# Altium PCB PCB.PcbDoc
Units mil, origin at the board's own origin, x right, y up, seen from the top; angles counter-clockwise.
Board outline 3543.31 x 2047.24 mil, 2 copper layers (Top Layer, Bottom Layer); 28 components, 33 nets, 105 pads, 0 vias.
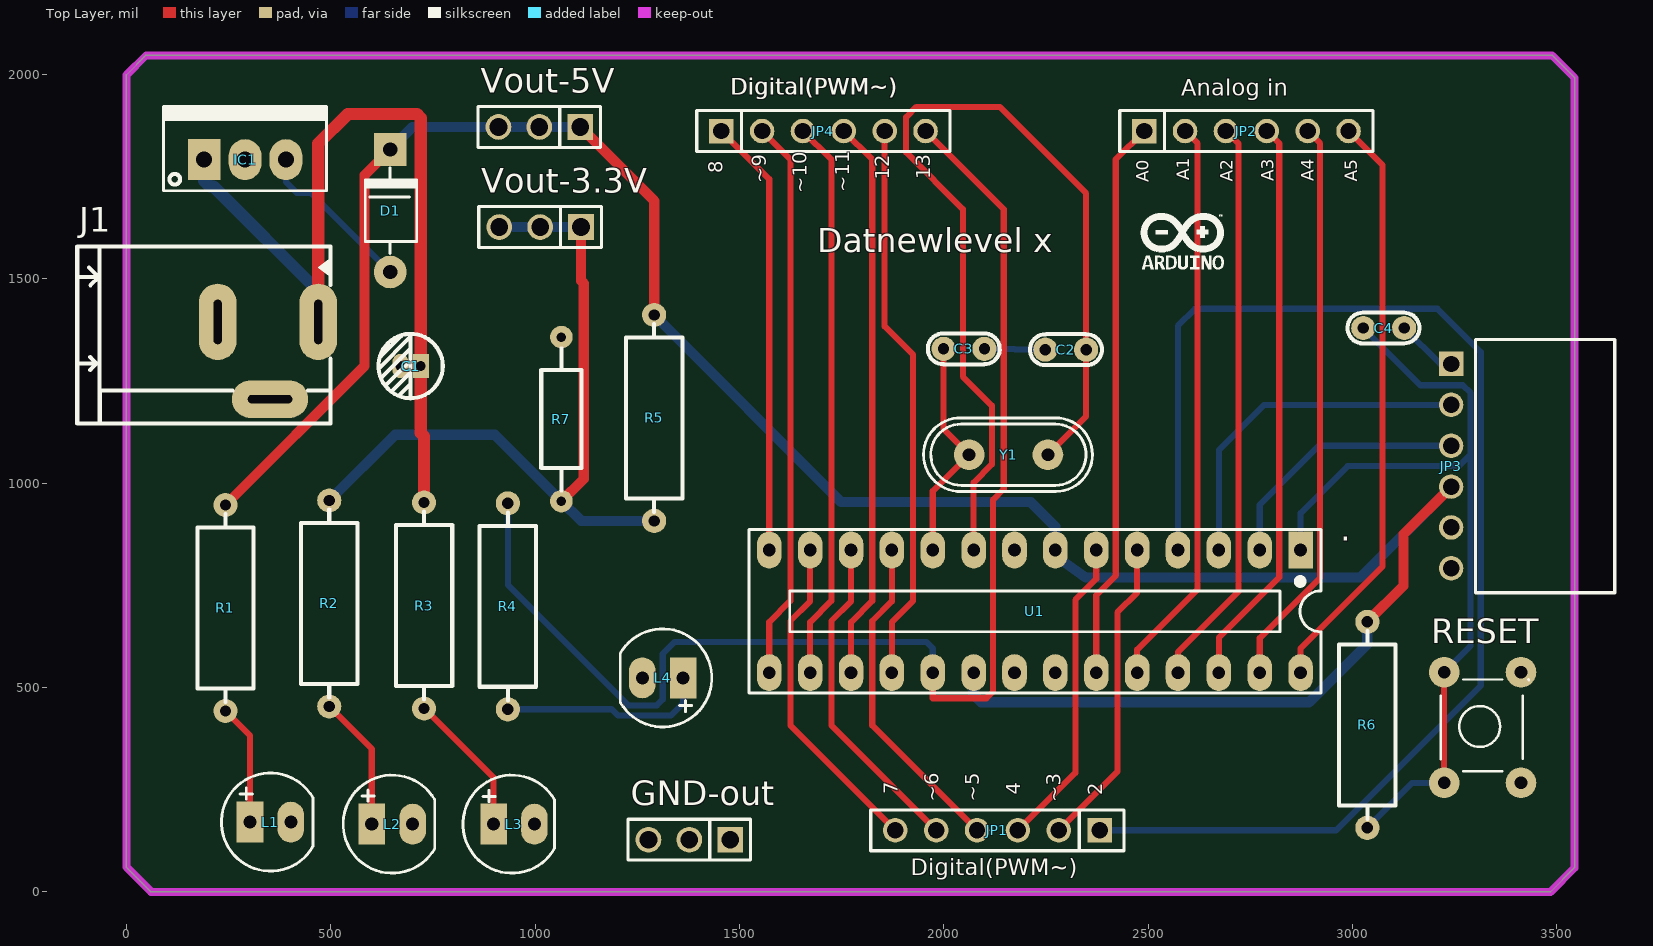
[diagram p0: Top Layer view]
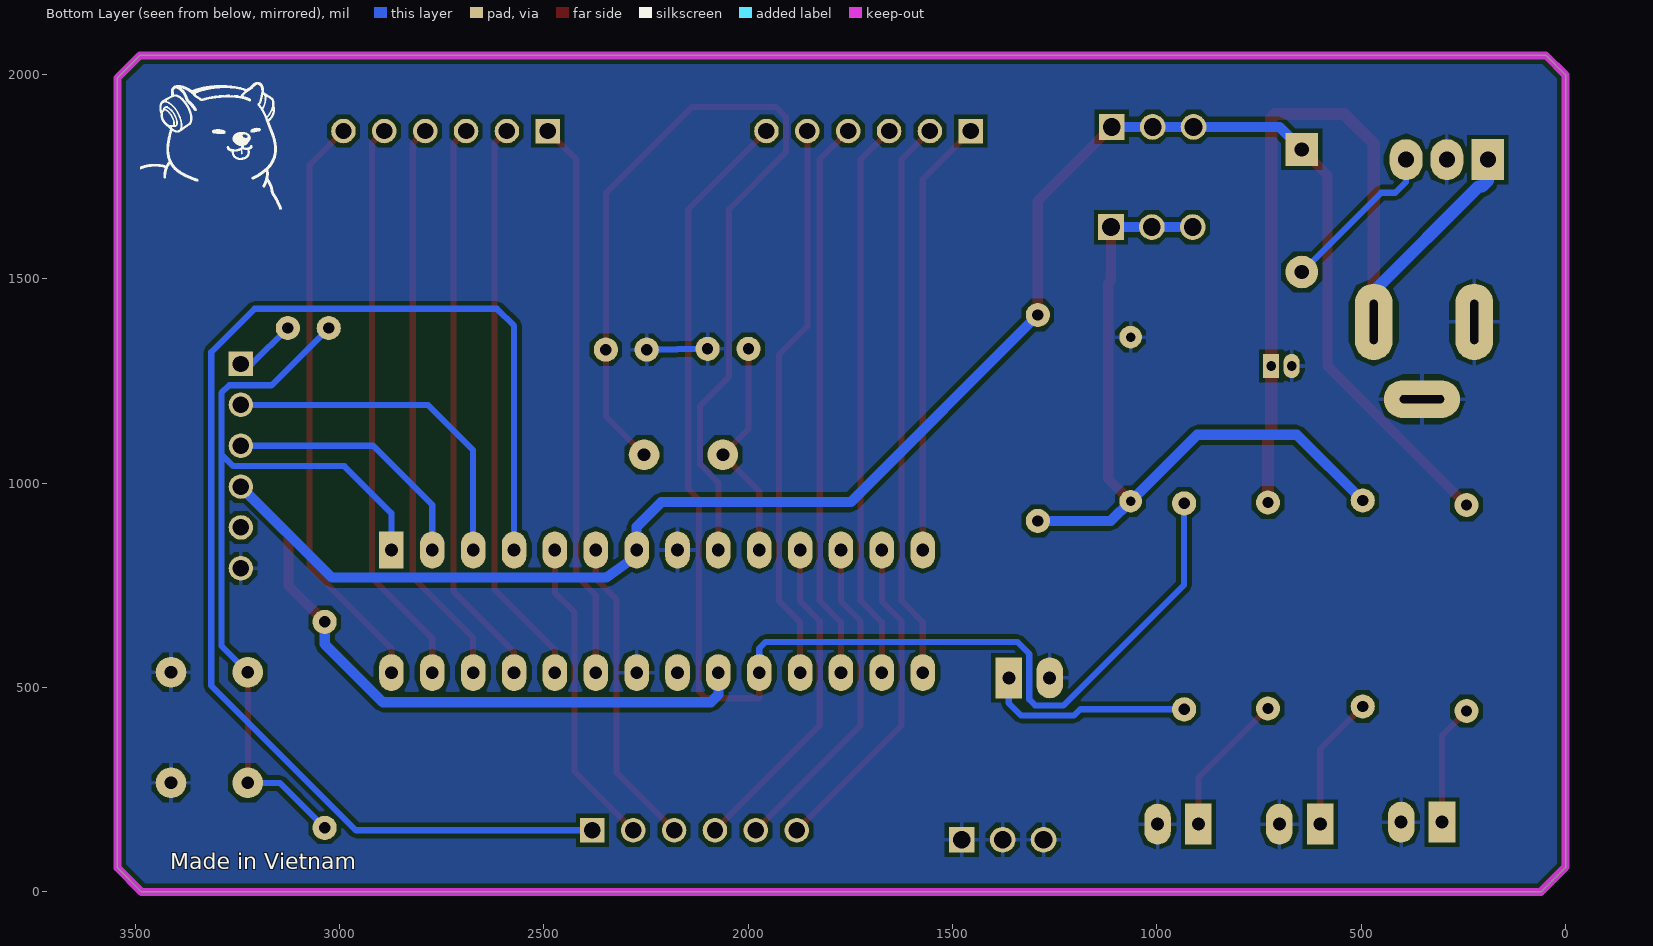
[diagram p1: Bottom Layer view, seen from below]
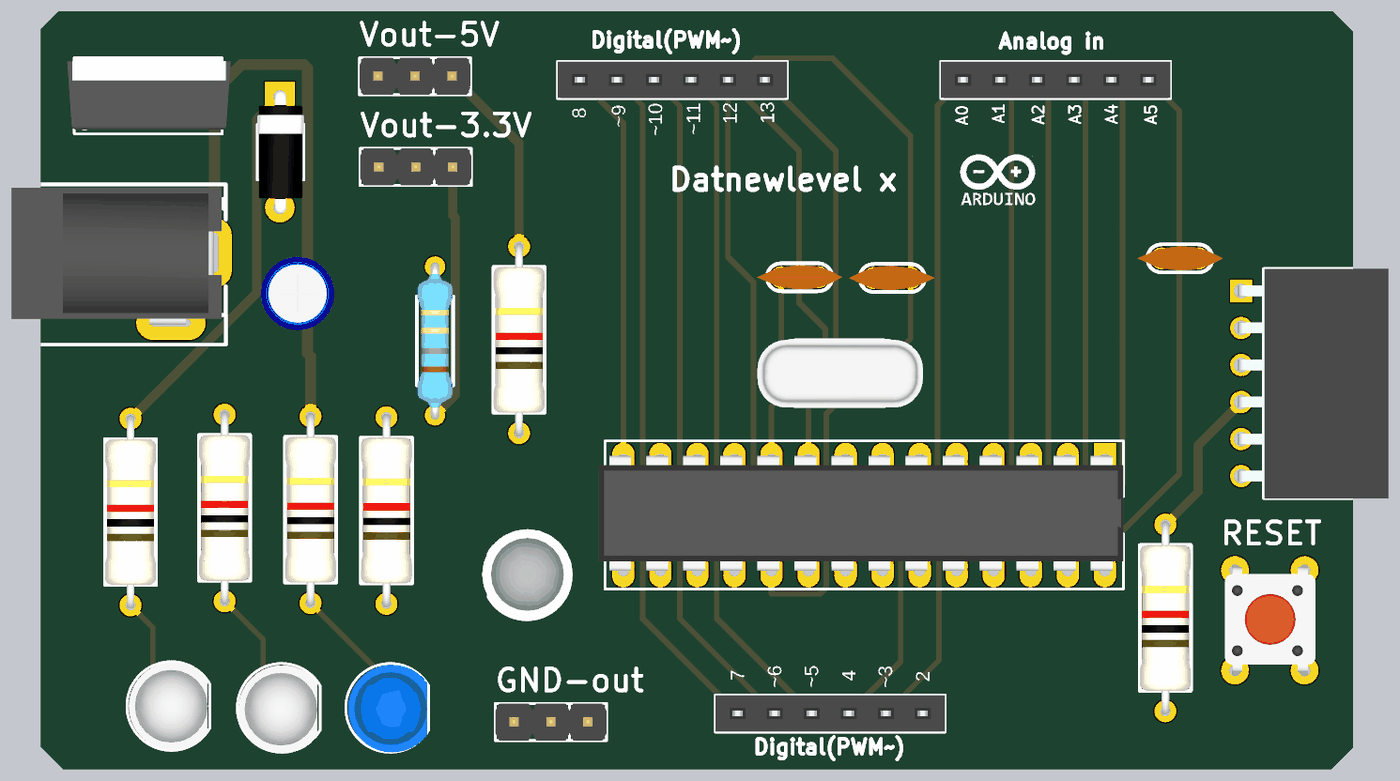
[diagram p2: 3D render of the assembled board from above, using the file's embedded part models]

## Layer stack, top to bottom
Top Solder: solder mask 0.4, Solder Resist, Dk 3.5
Top Layer: signal copper 1.4
Dielectric 1: dielectric 12.6, FR-4, Dk 4.8
Bottom Layer: signal copper 1.4
Bottom Solder: solder mask 0.4, Solder Resist, Dk 3.5

## Board outline
0,60.04 60.04,0 3484.25,0 3543.31,59.05 3543.31,1992.13 3488.19,2047.24 48.23,2047.24 0,1999.02

## Design rules (kind name [scope] priority, off if disabled: settings)
Clearance [All] p1: gap=10 ignorepadtopadclearanceinfootprint=FALSE
PolygonConnect [All] p1: connectstyle=Relief reliefconductorwidth=10 reliefentries=4 polygonreliefangle="90 Angle" airgapwidth=10
RoutingVias [All] p1: holewidth=25 width=25 viastyle="Through Hole" minholewidth=25 minwidth=25 maxholewidth=25 maxwidth=25
SolderMaskExpansion [All] p1: expansion=4 istentingtop=FALSE
Width "Schematic Width Constraint_2" [InNet('3.3V')] p1: maxlimit=25 minlimit=25 preferedwidth=25
Width "Schematic Width Constraint_1" [InNet('9V')] p2: maxlimit=30 minlimit=30 preferedwidth=30
Width "Schematic Width Constraint" [InNet('5V')] p3: maxlimit=25 minlimit=25 preferedwidth=25
Width [All] p4: maxlimit=15 minlimit=15 preferedwidth=15
30 further rules are at their usual default settings.

## Components (designator, comment, footprint, x,y, rotation, side; value= is the part's Value field where it differs from the comment)
C1 "10uF" "tu hoa 4mm" 695.39,1286.81 r180 top
C2 "22pF" "tu gom" 2298.39,1326.81 r180 top
C3 "22pF" "tu gom" 2049.39,1328.81 r0 top
C4 "101" "tu gom" 3076.39,1379.81 r0 top
D1 "100v" "DIODE 1A" 645.39,1466.81 r270 top
GND-out "JP 1x3 2.54" "JP 1x3 DT" 1477.39,127.81 r180 top
IC1 "LM7805" QTO-220 190.39,1791.81 r0 top
J1 "DC -JACK" CON3_129_PJ-002A_TH_RA 469.43,1394.69 r0 top
JP1 "Digital pin" "JP 1x6 CT" 2381.39,150.81 r180 top
JP2 "Analog pin" "JP 1x6 CT" 2490.39,1861.81 r0 top
JP3 "JP 1x6 2.54" "JP 1x6 CC" 3241.28,1041.81 r270 top
JP4 "Digital Pin" "JP 1x6 CT" 1455.39,1861.81 r0 top
L1 "LED 5mm" LED-5MM-RED 302.39,170.81 r0 top
L2 "LED 5mm" LED-5MM-Yellow 600.39,165.81 r0 top
L3 "LED 5mm" LED-5MM-BLUE 943.39,165.81 r0 top
L4 "LED 5mm" LED-5MM-WHITE 1312.39,523.81 r180 top
R1 "220R" "tro vach 1/2w" 242.39,694.81 r90 top
R2 "220R" "tro vach 1/2w" 496.39,705.81 r90 top
R3 "330R" "tro vach 1/2w" 728.39,700.81 r90 top
R4 "220R" "tro vach 1/2w" 933.39,698.81 r90 top
R5 "1k" "tro vach 1/2w" 1291.39,1159.81 r90 top
R6 "10k" "tro vach 1/2w" 3036.39,408.81 r90 top
R7 "2k" "tro vach 1/4w" 1064.39,1156.81 r270 top
RESET "Nut Nhan 4 Chan Cam 6x6" "Nut Nhan 4 Chan Cam 6x6" 3216.39,279.81 r90 top (schematic designator BT1)
U1 "Atmega328P" DIP28/W0.3 2873.03,836.62 r180 top value=DIP28
Vout-3.3V "JP 1x3 2.54" "JP 1x3 DT" 1112.39,1626.81 r180 top
Vout-5V "JP 1x3 2.54" "JP 1x3 DT" 1110.39,1871.81 r180 top
Y1 "16Mhz" "Thach Anh 2 chan cam" 2158.39,1069.81 r0 top value=4Mhz

## Footprints (in the part's own frame and the unit in brackets; to place one, negate y for a bottom-side part, rotate by r counter-clockwise, add the part's x,y. Pads: shape width x height; smd on the part's side, far side on the other; paste and mask are expansions set on the pad)
CON3_129_PJ-002A_TH_RA [mm] "DC JACK"
  oval 2.35x4.75 hole 0.5 slot 2.75 at 90 deg: 1(0,0) 2(-6.248,0)
  oval 4.75x2.35 hole 2.75 slot 0.5 at 90 deg: 3(-2.997,-4.801)
  silkscreen extent -14.98,-6.3 0.81,4.7, body extent -13.92,-4.93 0.48,4.47, height 11.01
"DIODE 1A" [mil] "Diode 1A"
  round 80 hole 35: 1(-50,0)
  rect 80x80 hole 35: 2(-350,0)
  silkscreen extent -305,-61 -95,65, body extent -366,-61 -34,65, height 122
DIP28/W0.3 [mil] "28 PIN, W 300mil, Pin to pin 100mil"
  rect 60x90 hole 31: 1(0,0)
  oval 60x90 hole 31: 2(100,0) 3(200,0) 4(300,0) 5(400,0) 6(500,0) 7(600,0) 8(700,0) 9(800,0) 10(900,0) 11(1000,0) 12(1100,0) 13(1200,0) 14(1300,0) 15(1300,300) 16(1200,300) 17(1100,300) 18(1000,300) 19(900,300) 20(800,300) 21(700,300) 22(600,300) 23(500,300) 24(400,300) 25(300,300) 26(200,300) 27(100,300) 28(0,300)
  silkscreen extent -50,-50 1350,350, body extent -50,-10 1367,300, height 200
"JP 1x3 DT" [mm]
  rect 1.6x1.6 hole 1.1: 1(0,0)
  round 1.6 hole 1.1: 2(2.54,0) 3(5.08,0)
  silkscreen extent -1.27,-1.27 6.35,1.27, body extent -1.27,-1.27 6.35,1.27, height 8.54
"JP 1x6 CC" [mm] "06p 1 row Right angle"
  rect 1.52x1.52 hole 1.02: 1(-6.35,0)
  round 1.52 hole 1.02: 2(-3.81,0) 3(-1.27,0) 4(1.27,0) 5(3.81,0) 6(6.35,0)
  silkscreen extent -7.87,1.52 7.87,10.17, body extent -7.87,-0.21 7.87,10.09, height 2.51
"JP 1x6 CT" [mm] "6 row, straight, gold plating"
  rect 1.52x1.52 hole 1.02: 1(0,0)
  round 1.52 hole 1.02: 2(2.54,0) 3(5.08,0) 4(7.62,0) 5(10.16,0) 6(12.7,0)
  silkscreen extent -1.52,-1.27 14.22,1.27, body extent -1.52,-1.25 14.22,1.25, height 8.51
LED-5MM-BLUE [mil] "LED 2 PIN, 5 ly , Only colour, pin to pin 110mil"
  rect 65x100 hole 32: 1(-45,0)
  oval 65x100 hole 32: 2(55,0)
  silkscreen extent -120,-120 104,120, body extent -113,-120 100,117, height 339
LED-5MM-RED [mil] "LED 2 PIN, 5 ly , Only colour,pin to pin 100mil"
  rect 65x100 hole 32: 1(0,0)
  oval 65x100 hole 32: 2(100,0)
  silkscreen extent -70,-120 154,120, body extent -65,-119 149,118, height 339
LED-5MM-WHITE [mil] "LED 2 PIN, 5 ly , Only colour, pin to pin 110mil"
  rect 65x100 hole 32: 1(-50,0)
  oval 65x100 hole 32: 2(50,0)
  silkscreen extent -120,-120 104,120, body extent -124,-125 121,120, height 340
LED-5MM-Yellow [mil] "LED 2 PIN, 5 ly , Only colour,pin to pin 100mil"
  rect 65x100 hole 32: 1(0,0)
  oval 65x100 hole 32: 2(100,0)
  silkscreen extent -70,-120 154,120, body extent -67,-122 147,115, height 339
"Nut Nhan 4 Chan Cam 6x6" [mil] "SW button 4pin, 250 x250 mil"
  round 75 hole 31: 1(-13,-8) 1(258,-8) 2(-13,-196) 2(258,-196)
  silkscreen extent 15,-215 240,0, body extent -31,-225 281,19, height 276
QTO-220 [mil] "TO-220 - 1-2-3"
  rect 80x100 hole 39: 1(0,0)
  oval 80x100 hole 39: 2(100,0) 3(200,0)
  silkscreen extent -100,-76 300,130, body extent -119,-64 322,121, height 755
"Thach Anh 2 chan cam" [mm]
  round 1.905 hole 0.8: 1(-2.45,0) 2(2.45,0)
  silkscreen extent -5.28,-2.29 5.21,2.29, body extent -5.68,-2.36 5.68,2.29, height 3.5
"tro vach 1/2w" [mm]
  round 1.5 hole 0.7: 1(-6.4,0) 2(6.4,0)
  silkscreen extent -5.84,-1.75 5.84,1.75, body extent -6.62,-1.75 6.62,1.75, height 3.5
"tro vach 1/4w" [mm]
  round 1.4 hole 0.6: 1(-5.1,0) 2(5.1,0)
  silkscreen extent -4.39,-1.25 4.42,1.25, body extent -5.38,-1.2 5.38,1.2, height 2.41
"tu gom" [mm] "Tu gom mini"
  round 1.5 hole 0.7: 1(-1.27,0) 2(1.27,0)
  silkscreen extent -2.25,-0.97 2.22,0.97, body extent -2.92,-0.85 2.92,0.85, height 6.12
"tu hoa 4mm" [mm]
  rect 1x1.5 hole 0.6: 1(-0.635,0)
  oval 1x1.5 hole 0.6: 2(0.635,0)
  silkscreen extent -2,-2 2.01,2.01, body extent -2.47,-2.47 2.58,2.58, height 14.81

## Part data
C1: library part "Tu Hoa 10uF 25V 4x7", "Cắm", Chung_Loai=Cắm, Don_Vi=Con, Ma_Hang=MH001349, So_Chan=2, Ten_Linh_Kien="Tụ Hóa 10uF 25V 4x7MM"
C2 C3: library part "Tu gom 22pF 50V", "Cắm", Chung_Loai=Cắm, Don_Vi=Con, Ma_Hang=MH004771, So_Chan=2, Ten_Linh_Kien="Tụ gốm 22P 50V"
C4: library part "Tu gom 101 50V", "Cắm", Chung_Loai=Cắm, Don_Vi=Con, Ma_Hang=MH004764, So_Chan=2, Ten_Linh_Kien="Tụ gốm 101 0.1nF 50V"
D1: library part "Diode 1N4007", "Cắm", Chung_Loai=Cắm, Don_Vi=Con, Ma_Hang=MH001063, Ten_Linh_Kien="Diode 1N4007 1A (DIP)"
GND-out Vout-3.3V Vout-5V: library part "JP 1x3 2.54 Duc Thang", "Cắm", Chung_Loai=Cắm, Don_Vi=Con, Ma_Hang=MH000903, Ten_Linh_Kien="Jump Đơn Đực 2.54MM 1x40P Thẳng 11MM"
IC1: library part LM78xx, "On ap +, from + 5 to + 24VDC"
J1: library part CON-PLG_3X1-228-DC_JACK, "3 Pins, 1 Row 228mil Pitch, right angle Connector, male", Alternate Part Number-1=NA, Case/Package=TH-CON, Manufacturer=JST, Manufacturer Part Number=PJ-002A, Supplier Part Number-1=NA, Supplier-1="SP ROAD"
JP1 JP2 JP4: library part "JP 1x6 2.54 Cai Thang", "Cắm", Chung_Loai=Cắm, Don_Vi=Con, Ma_Hang=MH004006, Ten_Linh_Kien="Jump Đơn Cái 2.54MM 1x20P Thẳng"
JP3: library part "JP 1x6 2.54 Cai Cong", "Cắm", Chung_Loai=Cắm, Don_Vi=Con, Ma_Hang=MH001265, Ten_Linh_Kien="Jump Đơn Cái 2.54MM 1x40P Cong"
L1: library part "LED 5mm Do", "Cắm", Chung_Loai=Cắm, Don_Vi=Con, Ma_Hang=MH008967, Ten_Linh_Kien="Led 5MM Phủ Đỏ (1000c)"
L2: library part "LED 5mm Vang", "Cắm", Chung_Loai=Cắm, Don_Vi=Con, Ma_Hang=MH008968, Ten_Linh_Kien="Led 5MM Phủ Vàng (1000c)"
L3: library part "LED 5mm Xanh Duong", "Cắm", Chung_Loai=Cắm, Don_Vi=Con, Ma_Hang=MH008987, Ten_Linh_Kien="Led 5MM Xanh Dương Đục (1000c)"
L4: library part "LED 5mm Trang", "Cắm", Chung_Loai=Cắm, Don_Vi=Con, Ma_Hang=MH008983, Ten_Linh_Kien="Led 5MM Trắng Đục (1000c)"
R1 R2 R4: library part "Tro Vach 1/2W 5% 240R", "Cắm", Chung_Loai=Cắm, Don_Vi=Con, Ma_Hang=MH006191, So_Chan=2, Ten_Linh_Kien="Trở 5% 1/2w 240R"
R3: library part "Tro Vach 1/2W 5% 330R", "Cắm", Chung_Loai=Cắm, Don_Vi=Con, Ma_Hang=MH006204, So_Chan=2, Ten_Linh_Kien="Trở 5% 1/2w 330R"
R5: library part "Tro Vach 1/2W 5% 1k", "Cắm", Chung_Loai=Cắm, Don_Vi=Con, Ma_Hang=MH007240, So_Chan=2, Ten_Linh_Kien="Trở 5% 1/2w 1K"
R6: library part "Tro Vach 1/2W 5% 10k", "Cắm", Chung_Loai=Cắm, Don_Vi=Con, Ma_Hang=MH006206, So_Chan=2, Ten_Linh_Kien="Trở 5% 1/2w 10k"
R7: library part "Tro Vach 1/4W 5% 2k", "Cắm", Chung_Loai=Cắm, Don_Vi=Con, Ma_Hang=MH007305, So_Chan=2, Ten_Linh_Kien="Trở Vạch 1/4w 5% 2k"
RESET: "Nut Nhan 4 Chan 6x6mm", Ma_Hang=MH004584, Ten="Nút Nhấn 4 Chân 6x6x5MM DIP"
U1: library part DIP28, "DIP28"
Y1: library part "Thach Anh 2 chan Cam", "Crystal For all Crystal 2pin."

## Nets (pads, with @x,y where several pads share a name; then routed paths per layer and width w, separated by ;. In a path a pad name is that pad's centre, name@x,y a point inside that pad or via, vN(x,y) a via of type N, cw(c..) or ccw(c..) an arc to the next point about the centre after c; other vN are vias at no path point)
3.3V: R2.2 R5.1 R7.2 Vout-3.3V.1 Vout-3.3V.2 Vout-3.3V.3 | length 1845.2
  Top Layer w25: R7.2 1118.88,1010.51 1118.88,1488.9 1112.39,1495.38 Vout-3.3V.1
  Bottom Layer w25: R2.2 657.51,1118.9 901.52,1118.9 R7.2 1112.57,907.84 R5.1 ; Vout-3.3V.3 Vout-3.3V.2 Vout-3.3V.1
5V: D1.2 JP3.4 R1.2 R5.2 R6.2 U1.7 U1.20 Vout-5V.1 Vout-5V.2 Vout-5V.3 | length 5959.4
  Top Layer w25: R1.2 582.88,1287.26 582.88,1754.3 D1.2 ; Vout-5V.1 1291.39,1690.81 R5.2 ; R6.2 3124.88,749.26 3124.88,875.41 JP3.4
  Bottom Layer w25: D1.2 700.39,1871.81 Vout-5V.3 Vout-5V.2 Vout-5V.1 ; R5.2 1749.27,953.9 2212.88,953.9 2273.03,893.75 U1.7 2273.03,821.9 2347.66,769.11 3018.59,769.11 JP3.4 ; U1.20 2073.03,482.75 2091.88,463.9 2893.88,463.9 3036.39,606.41 R6.2
9V: C1.1 IC1.1 J1.1 R3.2 | length 2183.7
  Top Layer w30: J1.1 469.42,1830.99 541.88,1903.44 710.88,1903.44 720.39,1893.93 C1.1 720.39,1122.9 728.39,1114.9 R3.2
  Bottom Layer w30: IC1.1 190.39,1739.88 204.38,1725.9 213.42,1725.9 469.42,1469.9 J1.1
A0: JP2.1 U1.23 | length 1373.8
  Top Layer w15: U1.23 2373.03,726.05 2420.88,773.9 2420.88,1792.3 JP2.1
A1: JP2.2 U1.24 | length 1399.1
  Top Layer w15: U1.24 2473.03,592.9 2620.88,740.75 2620.88,1831.32 JP2.2
A2: JP2.3 U1.25 | length 1399.1
  Top Layer w15: U1.25 2573.03,586.9 2720.88,734.75 2720.88,1831.32 JP2.3
A3: JP2.4 U1.26 | length 1399.1
  Top Layer w15: U1.26 2673.03,622.05 2820.88,769.9 2820.88,1831.32 JP2.4
A4: JP2.5 U1.27 | length 1399.1
  Top Layer w15: U1.27 2773.03,620.9 2920.88,768.75 2920.88,1831.32 JP2.5
A5: JP2.6 U1.28 | length 1443
  Top Layer w15: U1.28 2873.03,595.9 3073.88,796.75 3073.88,1778.32 JP2.6
D2: JP1.1 U1.4 | length 3245.7
  Bottom Layer w15: JP1.1 2959.79,150.81 3313.88,504.9 3313.88,1320.9 3207.88,1426.9 2614.88,1426.9 2573.03,1385.05 U1.4
D4: JP1.3 U1.6 | length 765.2
  Top Layer w15: JP1.3 2321.88,291.3 2321.88,714.75 2373.03,765.9 U1.6
D7: JP1.6 U1.13 | length 812
  Top Layer w15: U1.13 1673.03,711.05 1624.88,662.9 1624.88,407.32 JP1.6
D8: JP4.1 U1.14 | length 1073.9
  Top Layer w15: JP4.1 1573.03,1744.17 U1.14
D12: JP4.5 U1.18 | length 1375.5
  Top Layer w15: JP4.5 1855.39,1383.9 1924.88,1314.41 1924.88,711.9 1873.03,660.05 U1.18
D13: JP4.6 R4.2 U1.19 | length 3235.8
  Top Layer w15: JP4.6 2146.88,1670.32 2146.88,985.9 2120.88,959.9 2120.88,490.4 2104.38,473.9 1973.03,473.9 U1.19
  Bottom Layer w15: R4.2 933.39,751.38 1228.47,456.31 1297.8,456.31 1312.39,470.9 1312.39,582.41 1341.88,611.9 1957.03,611.9 1973.03,595.9 U1.19
GND: C1.2 C2.2 C3.2 GND-out.1 GND-out.2 GND-out.3 IC1.2 J1.2 J1.3 JP3.6 L1.2 L2.2 L3.2 L4.2 R7.1 RESET.2 U1.8 U1.22 | length 211.8
  Top Layer w15: J1.2@223.42,1333.68 J1.2
  Bottom Layer w15: L1.2@402.39,169.9 L1.2 ; C1.2 C1.2@670.39,1286.9 ; C3.2 2172.88,1328.81 2174.88,1326.81 C2.2
NetC4_2: C4.2 JP3.1 | length 151.3
  Bottom Layer w15: C4.2 3214.39,1291.81 JP3.1
NetD1_1: D1.1 IC1.3 | length 400.8
  Bottom Layer w15: IC1.3 390.39,1737.38 416.88,1710.9 451.3,1710.9 D1.1
NetL1_1: L1.1 R1.1 | length 296.9
  Top Layer w15: R1.1 302.39,382.84 L1.1
NetL2_1: L2.1 R2.1 | length 331.1
  Top Layer w15: R2.1 600.39,349.84 L2.1
NetL3_1: L3.1 R3.1 | length 353.4
  Top Layer w15: R3.1 898.39,278.84 L3.1
NetL4_1: L4.1 R4.1 | length 510
  Bottom Layer w15: R4.1 1187.39,446.84 1202.92,431.31 1331.8,431.31 1362.39,461.9 L4.1
RESET: C4.1 R6.1 RESET.1 U1.1 | length 2108.5
  Top Layer w15: RESET.1@3224.39,266.81 RESET.1@3224.39,537.81
  Bottom Layer w15: U1.1 2873.03,927.05 2987.88,1041.9 3259.88,1041.9 3288.88,1070.9 ; C4.1 3166.3,1239.9 3269.88,1239.9 3288.88,1220.9 3288.88,1070.9 ; R6.1 3146.36,266.81 RESET.1@3224.39,266.81 ; RESET.1@3224.39,537.81 3288.88,602.3 3288.88,1070.9
RX: JP3.3 U1.2 | length 638.6
  Bottom Layer w15: U1.2 2773.03,946.9 2917.94,1091.81 JP3.3
TX: JP3.2 U1.3 | length 858.6
  Bottom Layer w15: U1.3 2673.03,1081.05 2783.79,1191.81 JP3.2
XTAL1: C2.1 U1.9 Y1.2 | length 2381.6
  Top Layer w15: U1.9 2073.03,1001.05 2117.88,1045.9 2117.88,1189.9 2046.88,1260.9 2046.88,1670.9 1907.88,1809.9 1907.88,1895.9 1932.88,1920.9 2136.88,1920.9 2348.39,1709.38 C2.1 2348.39,1163.35 Y1.2
XTAL2: C3.1 U1.10 Y1.1 | length 554.9
  Top Layer w15: U1.10 1973.03,980.9 Y1.1 1999.39,1132.35 C3.1
~D3: JP1.2 U1.5 | length 765.2
  Top Layer w15: JP1.2 2424.88,294.3 2424.88,683.9 2473.03,732.05 U1.5
~D5: JP1.4 U1.11 | length 812
  Top Layer w15: U1.11 1873.03,711.05 1824.88,662.9 1824.88,407.32 JP1.4
~D6: JP1.5 U1.12 | length 812
  Top Layer w15: U1.12 1773.03,711.05 1724.88,662.9 1724.88,407.32 JP1.5
~D9: JP4.2 U1.15 | length 1375.5
  Top Layer w15: JP4.2 1624.88,1792.32 1624.88,711.9 1573.03,660.05 U1.15
~D10: JP4.3 U1.16 | length 1375.5
  Top Layer w15: JP4.3 1724.88,1792.32 1724.88,711.9 1673.03,660.05 U1.16
~D11: JP4.4 U1.17 | length 1375.5
  Top Layer w15: JP4.4 1824.88,1792.32 1824.88,711.9 1773.03,660.05 U1.17
pads on no net: JP3.5 U1.21

## Polygon pours and split planes (outlines as drawn)
no net on Bottom Overlay "GND_Botton" (solid): 0,1999.02 48.23,2047.24
GND on Bottom Layer "GND_Botton" (solid, remove dead copper, pour order 0): -99.27,2212.8 3748.81,2212.8 3915.35,2046.26 3812.01,1942.91 3812.01,-171.26 -241.14,-171.26 -285.43,-215.55

## Keep-outs
Keep-Out Layer:
  lines w19.68: 60.04,0 3484.15,0 3543.2,59.06 3543.2,1992.08 3488.15,2047.13 48.57,2047.13 0.42,1998.98 0.42,60.6 60.04,0.98

## Silkscreen, mask and mechanical layers (free items; w line width, h text height)
Top Overlay:
  drawing of 12 lines, arcs and shapes, not listed
  text "Digital(PWM~)" at 1478.07,1950.62 h40
  text "Digital(PWM~)" at 1478.5,1950.49 h40
  text "Analog in" at 2580.87,1947.54 h40
  text "8" at 1471.77,1757.87 h60 r90
  text "13" at 1979.65,1744.09 h60 r90
  text "12" at 1878.94,1743.11 h60 r90
  text "A1" at 2600.32,1741.22 h30 r90
  text "A3" at 2807.01,1739.25 h30 r90
  text "A4" at 2905.43,1739.25 h30 r90
  text "A2" at 2707.6,1738.27 h30 r90
  text "A5" at 3011.73,1738.27 h30 r90
  text "A0" at 2501.89,1736.3 h30 r90
  text "~9" at 1578.07,1734.25 h60 r90
  text "~11" at 1780.51,1712.6 h60 r90
  text "~10" at 1677.48,1709.65 h60 r90
  text "Datnewlevel x" at 1689.96,1564.96 h59.06
  text "." at 2969.96,859.72 h60
  text "7" at 1899.61,239.17 h60 r90
  text "4" at 2199.8,238.19 h60 r90
  text "2" at 2399.61,236.17 h60 r90
  text "~6" at 1999.33,220.47 h60 r90
  text "~5" at 2098.74,220.47 h60 r90
  text "~3" at 2298.57,219.62 h60 r90
  text "Digital(PWM~)" at 1918.95,41.38 h40
Bottom Overlay:
  drawing of 4 lines, arcs and shapes, not listed
  text "Made in Vietnam" at 3414.37,56.1 h39.37